# Altium PCB IOBoard.PcbDoc
Units mm, origin at the board's own origin, x right, y up, seen from the top; angles counter-clockwise.
Board outline 18.5 x 15 mm, 2 copper layers (Top Layer, Bottom Layer); 2 components, 76 nets, 14 pads, 2 vias.
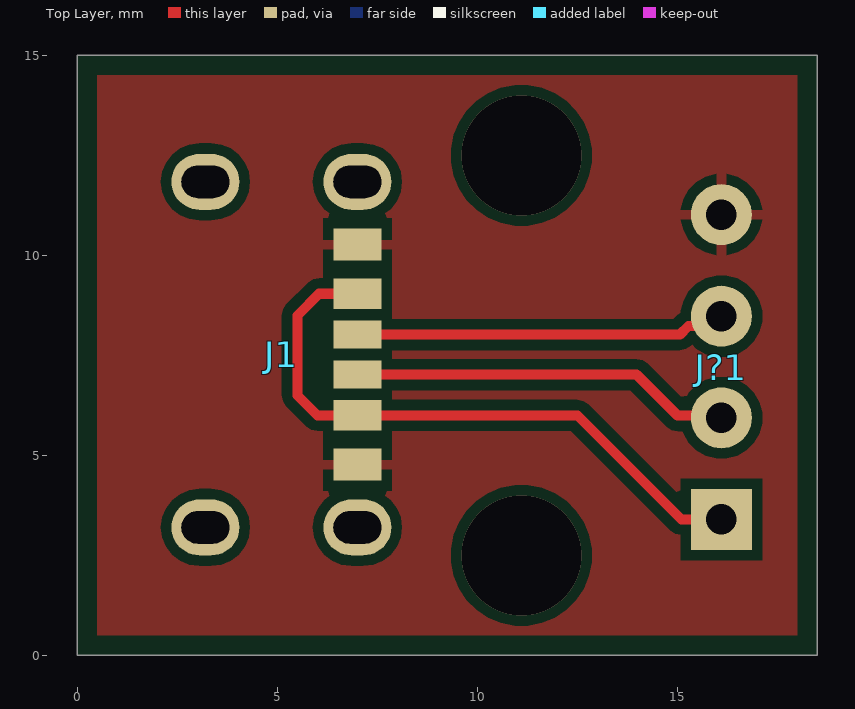
[diagram p0: Top Layer view]
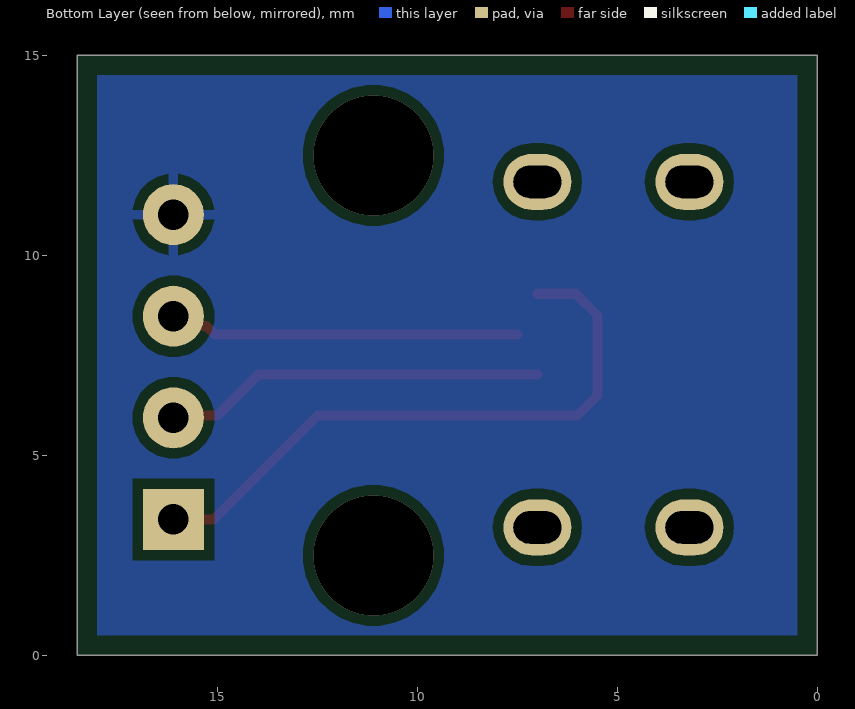
[diagram p1: Bottom Layer view, seen from below]

## Layer stack, top to bottom
Top Solder: solder mask 0.0102, Solder Resist, Dk 3.5
Top Layer: signal copper 0.0356
Dielectric 1: dielectric 0.32, FR-4, Dk 4.8
Bottom Layer: signal copper 0.0356
Bottom Solder: solder mask 0.0102, Solder Resist, Dk 3.5

## Board outline
0,0 18.5,0 18.5,15 0,15

## Design rules (kind name [scope] priority, off if disabled: settings)
Clearance [All] p1: gap=0.254 ignorepadtopadclearanceinfootprint=FALSE
PolygonConnect [All] p1: connectstyle=Relief reliefconductorwidth=0.254 reliefentries=4 polygonreliefangle="90 Angle" airgapwidth=0.254
RoutingVias [All] p1: holewidth=0.711 width=1.27 viastyle="Through Hole" minholewidth=0.711 minwidth=1.27 maxholewidth=0.711 maxwidth=1.27
SolderMaskExpansion [All] p1: expansion=0.102 istentingtop=FALSE
SupplyNets "Schematic Supply Nets_6" [InNet('+3.3')] p1: voltage=0.000
SupplyNets "Schematic Supply Nets_5" [InNet('VBUS')] p2: voltage=0.000
SupplyNets "Schematic Supply Nets_4" [InNet('+5')] p3: voltage=0.000
SupplyNets "Schematic Supply Nets_3" [InNet('GND')] p4: voltage=0.000
SupplyNets "Schematic Supply Nets_2" [InNet('VBAT')] p5: voltage=0.000
SupplyNets "Schematic Supply Nets_1" [InNet('+3.3U')] p6: voltage=0.000
SupplyNets "Schematic Supply Nets" [InNet('VIN')] p7: voltage=0.000
Width [All] p1: maxlimit=0.254 minlimit=0.254 preferedwidth=0.254
30 further rules are at their usual default settings.

## Classes and differential pairs
component class Main: J1

## Components (designator, comment, footprint, x,y, rotation, side; value= is the part's Value field where it differs from the comment)
J1 "USB4125" USB4125 7,7.52 r270 top
J?1 "Comment" "1x4 Header" 16.1,3.4 r90 top

## Footprints (in the part's own frame and the unit in brackets; to place one, negate y for a bottom-side part, rotate by r counter-clockwise, add the part's x,y. Pads: shape width x height; smd on the part's side, far side on the other; paste and mask are expansions set on the pad)
"1x4 Header" [mil]
  rect 60x60 hole 30: 1(0,0)
  round 60 hole 30: 2(100,0) 3(200,0) 4(300,0)
USB4125 [mm]
  oval 1.4x1.7 hole 0.81 slot 1.2 at 90 deg unplated: 0(-4.32,0) 0(-4.32,-3.8) 0(4.32,0) 0(4.32,-3.8)
  rect 0.7x1.2 smd mask+0.05: A5(-0.5,0) B5(0.5,0)
  rect 0.76x1.2 smd mask+0.05: A9(1.52,0) B9(-1.52,0)
  rect 0.8x1.2 smd mask+0.05: A12(2.75,0) B12(-2.75,0)

## Part data
J1: library part 1x4_Header

## Via types
v1: diameter 3, hole 3, Top Layer to Bottom Layer, 2 vias

## Nets (pads, with @x,y where several pads share a name; then routed paths per layer and width w, separated by ;. In a path a pad name is that pad's centre, name@x,y a point inside that pad or via, vN(x,y) a via of type N, cw(c..) or ccw(c..) an arc to the next point about the centre after c; other vN are vias at no path point)
+3.3: 
+3.3U: 
+5: 
ALERT: 
AMP_M\U\T\E\: 
AMP_S\H\D\N\: 
BAT_CE: 
BAT_CHRG: 
BAT_IO: 
BAT_STDBY: 
BOOT: 
CC1: J1.A5 J?1.3 | length 8.8
  Top Layer w0.254: J1.A5@7.5,8.02 15.061,8.02 15.278,8.237 15.857,8.237 J?1.3
CC2: J1.B5 J?1.2 | length 9.5
  Top Layer w0.254: J1.B5 13.98,7.02 15.006,5.994 16.046,5.994 J?1.2
DAC_MUTE: 
DISPLAY_CS: 
DISPLAY_DC: 
DISPLAY_RESET: 
EN: 
GND: J1.A12 J1.B12 J?1.4
I2S_BCK: 
I2S_DIN: 
I2S_LRCK: 
I2S_SCK: 
I\N\T\: 
INL: 
INR: 
LED_B: 
LED_DIN: 
LED_G: 
LED_R: 
NetBT1_1: 
NetBT1_2: 
NetC6_2: 
NetC13_2: 
NetC18_2: 
NetC19_1: 
NetC23_2: 
NetC24_1: 
NetC25_2: 
NetC27_1: 
NetC27_2: 
NetC37_2: 
NetD2_1: 
NetD3_1: 
NetD3_3: 
NetD3_4: 
NetL1_1: 
NetL1_2: 
NetQ1_1: 
NetQ1_2: 
NetQ2_1: 
NetR2_2: 
NetR16_2: 
NetR19_1: 
NetR21_1: 
NetSPK1_1: 
NetSPK1_2: 
NetSPK2_1: 
NetSPK2_2: 
NetU6_2: 
PROG_CS: 
PROG_DATA: 
ROT_CLK: 
ROT_DATA: 
ROT_SW: 
RXD0: 
SCL: 
SD_CS: 
SDA: 
SPI_MISO: 
SPI_MOSI: 
SPI_SCK: 
TXD0: 
VBAT: 
VBUS: J1.A9 J1.B9 J?1.1 | length 15.6
  Top Layer w0.254: J1.B9 6.04,9.04 5.5,8.5 5.5,6.5 6,6 J1.A9 12.5,6 15.1,3.4 J?1.1
VIN: 
pads on no net: J1.0
copper on no net:
  other v1: 11.1,2.5 11.1,12.5

## Polygon pours and split planes (outlines as drawn)
GND on Bottom Layer "GND_L02_P000" (solid, pour order 0): 0.5,14.5 0.5,0.5 18,0.5 18,14.5
GND on Top Layer "GND_L01_P001" (solid, pour order 1): 0.5,14.5 0.5,0.5 18,0.5 18,14.5